# EAGLE board panelize-ext1 (EAGLE 7.2.0)
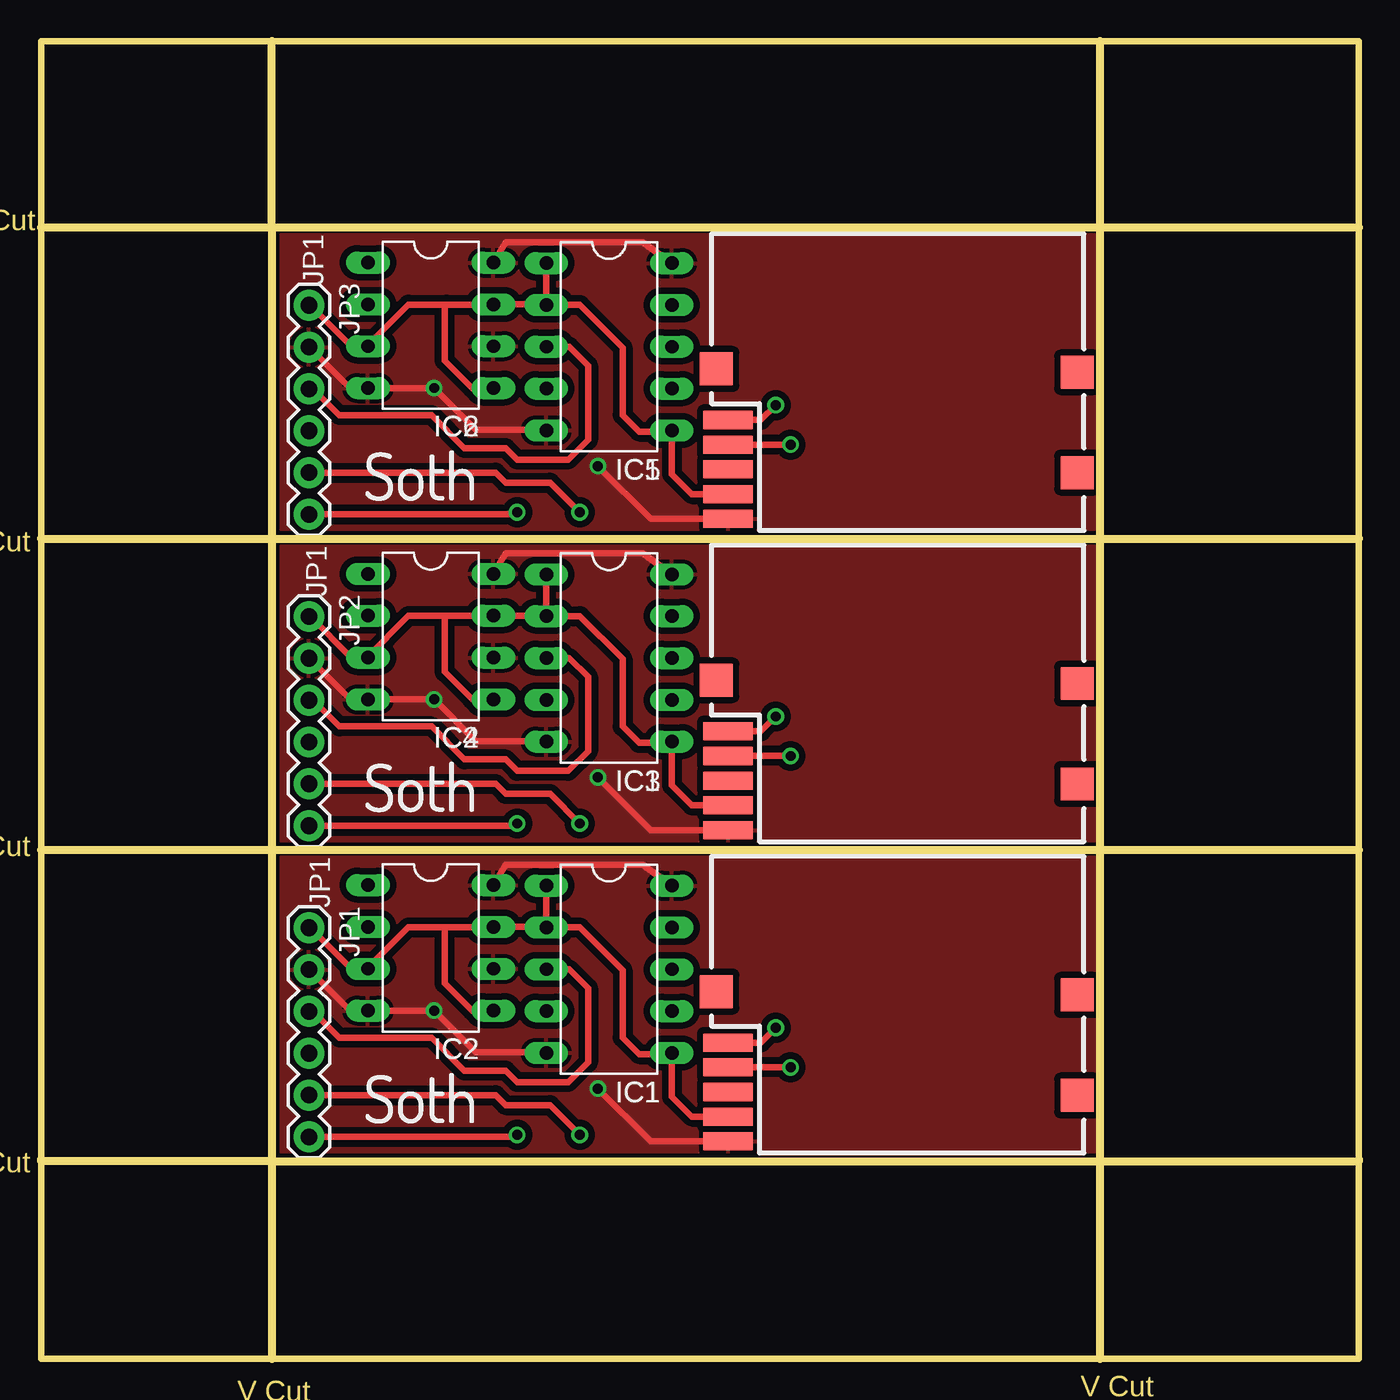
[diagram p0: board, top side]
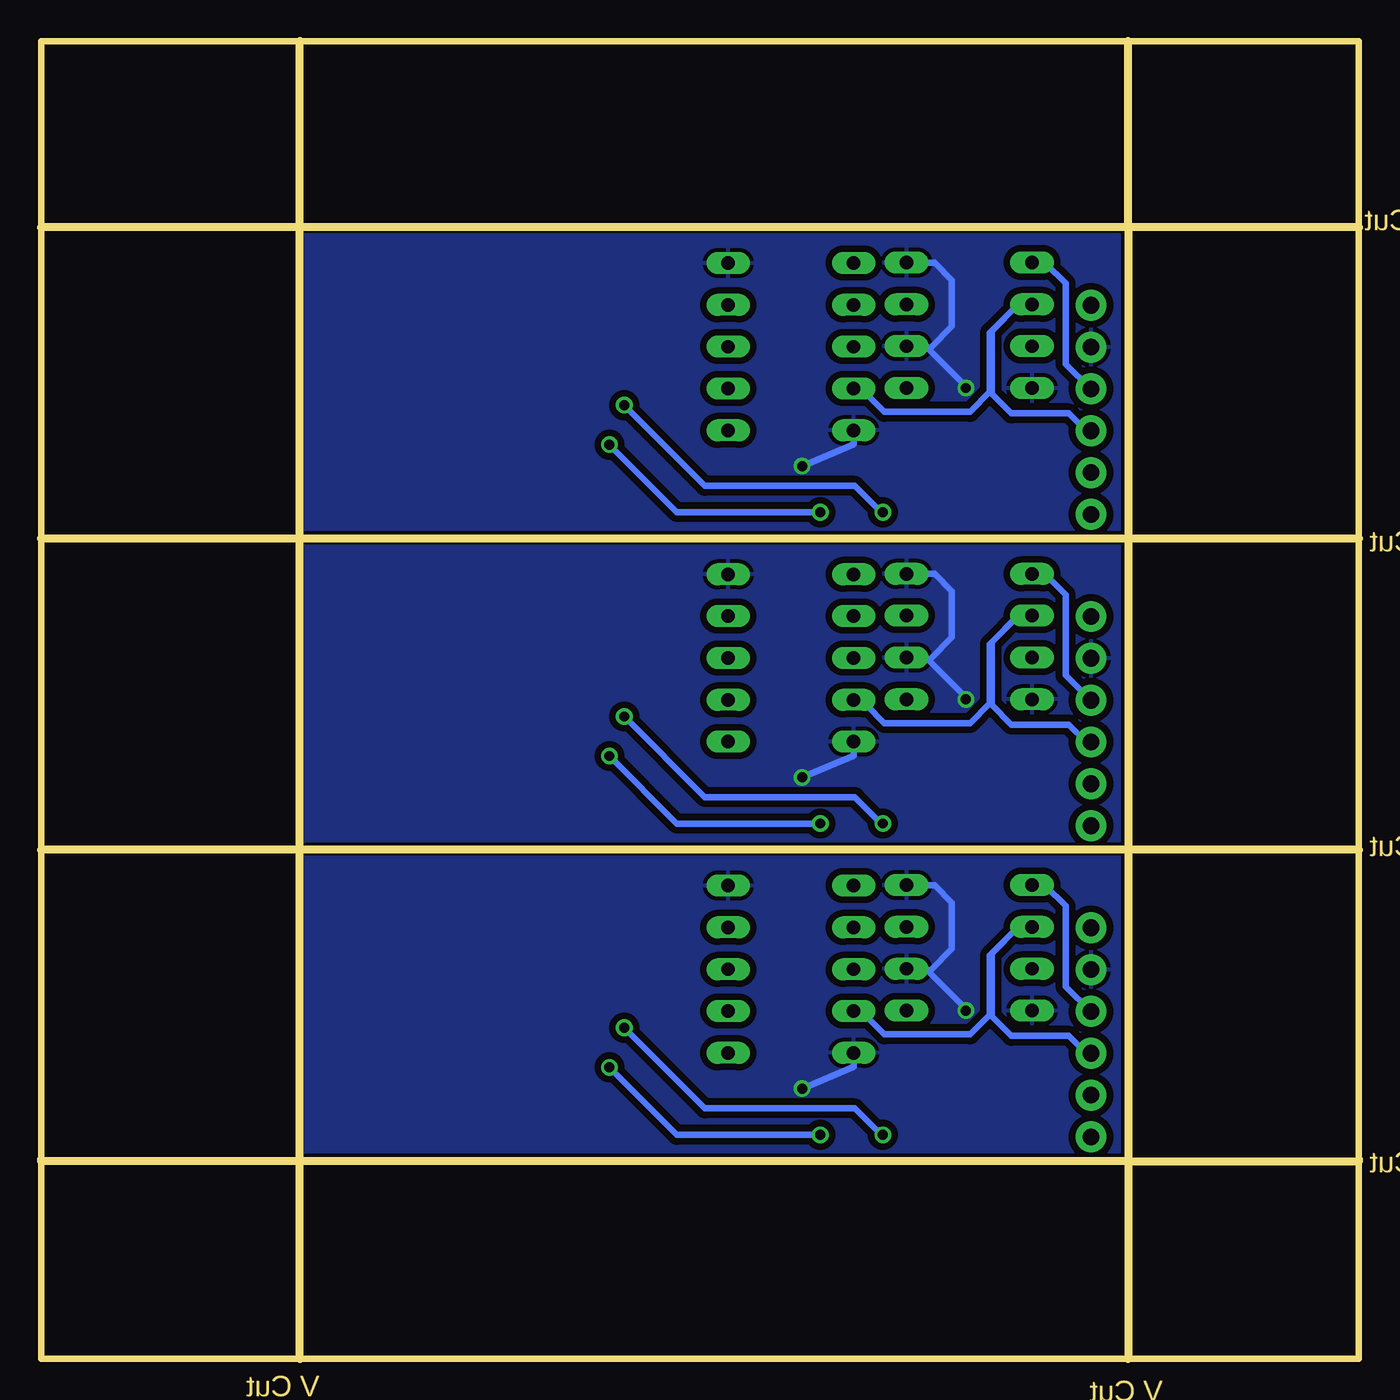
[diagram p1: board, bottom side, seen from below]

Size 80 x 80 mm. Coordinates in mm from the lower left corner, seen from the top.
Outline: 0,0 0,80 80,80 80,0 0,0
Copper layers (1*16): Top 0.035mm / dielectric 1.5mm / Bottom 0.035mm
Design rules "default": minimum track width 10mil, minimum drill 24mil, track to track 8mil, track to pad 8mil, pad to pad 8mil, via to via 8mil, smd to smd 8mil, copper to edge 40mil, drill to drill 8mil, minimum pad ring 10mil, minimum via ring 8mil, stop-mask expansion 4mil, vias tented up to drill 0mil, thermal gap 10mil
Milling: 14 lines

## Footprints (pad centres in the part's own frame; a part is rotated, then mirrored left to right if it is on the bottom)
DIL10 = drill 0.813 long: 1 -5.08,-3.81; 2 -2.54,-3.81; 3 0,-3.81; 4 2.54,-3.81; 5 5.08,-3.81; 6 5.08,3.81; 7 2.54,3.81; 8 0,3.81; 9 -2.54,3.81; 10 -5.08,3.81
DIL08 = drill 0.813 long: 1 -3.81,-3.81; 2 -1.27,-3.81; 3 1.27,-3.81; 4 3.81,-3.81; 5 3.81,3.81; 6 1.27,3.81; 7 -1.27,3.81; 8 -3.81,3.81
1X06 = drill 1.016 pad 1.88: 1 0,0; 2 2.54,0; 3 5.08,0; 4 7.62,0; 5 10.16,0; 6 12.7,0
GM318B = smd 3 x 1.1: GND 1,0.7; PWR_CTRL 1,6.7; RX 1,5.2; TX 1,3.7; VCC 1,2.2 | smd 2 x 2: MOUNT1 22.2,9.6; MOUNT2 22.2,3.5; MOUNT3 0.3,9.8

## Placement (x,y rotation side)
IC1  MPU-9250  [DIL10]  34.48,23.65 270 top
IC2  BME280  [DIL08]  23.65,24.95 270 top
IC3  MPU-9250  [DIL10]  34.48,42.55 270 top
IC4  BME280  [DIL08]  23.65,43.85 270 top
IC5  MPU-9250  [DIL10]  34.48,61.45 270 top
IC6  BME280  [DIL08]  23.65,62.75 270 top
JP1  [1X06]  16.26,26.17 270 top
JP2  [1X06]  16.26,45.07 270 top
JP3  [1X06]  16.26,63.97 270 top
U$1  GM318B  [GM318B]  40.7,12.5 0 top
U$2  SOTH_LOGO  [SILK_LOGO]  19.7,14.3 0 top
U$3  GM318B  [GM318B]  40.7,31.4 0 top
U$4  SOTH_LOGO  [SILK_LOGO]  19.7,33.2 0 top
U$5  GM318B  [GM318B]  40.7,50.3 0 top
U$6  SOTH_LOGO  [SILK_LOGO]  19.7,52.1 0 top

## Library data of the parts
IC1-IC6 = ic-package
JP1-JP3 = SparkFun-Connectors; PROD_ID: CONN-08437
U$1-U$6 = Soth

## Nets
GND [GND]: IC1.5 IC1.10 IC2.4 IC2.6 IC2.8 JP1.2 U$1.GND
GND1 [GND]: IC3.5 IC3.10 IC4.4 IC4.6 IC4.8 JP2.2 U$3.GND
GND2 [GND]: IC5.5 IC5.10 IC6.4 IC6.6 IC6.8 JP3.2 U$5.GND
N$1: JP2.5 U$3.RX
N$2: IC1.1 IC1.2 IC1.6 IC2.3 IC2.5 IC2.7 JP1.1 U$1.VCC
N$3: JP1.5 U$1.RX
N$4: JP1.6 U$1.PWR_CTRL
N$5: JP2.6 U$3.PWR_CTRL
N$6: IC3.4 IC4.2 JP2.4
N$7: IC1.4 IC2.2 JP1.4
N$8: IC1.3 IC2.1 JP1.3
N$9: IC3.3 IC4.1 JP2.3
N$10: IC3.1 IC3.2 IC3.6 IC4.3 IC4.5 IC4.7 JP2.1 U$3.VCC
N$11: JP3.5 U$5.RX
N$12: JP3.6 U$5.PWR_CTRL
N$13: IC5.4 IC6.2 JP3.4
N$14: IC5.3 IC6.1 JP3.3
N$15: IC5.1 IC5.2 IC5.6 IC6.3 IC6.5 IC6.7 JP3.1 U$5.VCC

## Tracks (layer width: path | path; a pad name or v marks a point on that pad's centre or on a via)
GND  (via drill 0.6)
  Top 0.406: JP1.2 18.7,21.2 19.28,21.2 IC2.4 v23.86,21.14 26.4,18.6 30.14,18.6 IC1.5 | 26.88,23.6 IC2.6 | IC2.8 28.2,30 36.52,30 IC1.10 | v33.8,16.4 37,13.2 U$1.GND
  Bottom 0.406: IC2.8 25.76,28.76 24.7,27.7 24.7,24.9 26,23.6 26.2,23.6 | 26.2,23.6 26.88,23.6 IC2.6 | v23.86,21.14 23.86,21.26 26.2,23.6 | IC1.5 30.67,17.73 v33.8,16.4
  pour Bottom (isolate 0.4): 14.5,30.5 64,30.5 64,12.5 14.5,12.5
  pour Top (isolate 0.4): 14.5,30.5 64,30.5 64,12.5 14.5,12.5
GND1  (via drill 0.6)
  Top 0.406: JP2.2 18.7,40.1 19.28,40.1 IC4.4 v23.86,40.04 26.4,37.5 30.14,37.5 IC3.5 | 26.88,42.5 IC4.6 | IC4.8 28.2,48.9 36.52,48.9 IC3.10 | v33.8,35.3 37,32.1 U$3.GND
  Bottom 0.406: IC4.8 25.76,47.66 24.7,46.6 24.7,43.8 26,42.5 26.2,42.5 | 26.2,42.5 26.88,42.5 IC4.6 | v23.86,40.04 23.86,40.16 26.2,42.5 | IC3.5 30.67,36.63 v33.8,35.3
  pour Bottom (isolate 0.4): 14.5,49.4 64,49.4 64,31.4 14.5,31.4
  pour Top (isolate 0.4): 14.5,49.4 64,49.4 64,31.4 14.5,31.4
GND2  (via drill 0.6)
  Top 0.406: JP3.2 18.7,59 19.28,59 IC6.4 v23.86,58.94 26.4,56.4 30.14,56.4 IC5.5 | 26.88,61.4 IC6.6 | IC6.8 28.2,67.8 36.52,67.8 IC5.10 | v33.8,54.2 37,51 U$5.GND
  Bottom 0.406: IC6.8 25.76,66.56 24.7,65.5 24.7,62.7 26,61.4 26.2,61.4 | 26.2,61.4 26.88,61.4 IC6.6 | v23.86,58.94 23.86,59.06 26.2,61.4 | IC5.5 30.67,55.53 v33.8,54.2
  pour Bottom (isolate 0.4): 14.5,68.3 64,68.3 64,50.3 14.5,50.3
  pour Top (isolate 0.4): 14.5,68.3 64,68.3 64,50.3 14.5,50.3
N$1  (via drill 0.6)
  Top 0.406: JP2.5 27.59,34.91 28.2,34.3 30.9,34.3 v32.7,32.5 | v45.5,36.6 U$3.RX
  Bottom 0.406: v32.7,32.5 41.4,32.5 v45.5,36.6
N$2
  Top 0.406: JP1.1 16.33,26.17 18.8,23.7 19.32,23.7 IC2.3 19.78,23.68 22.3,26.2 24.6,26.2 | 24.6,26.2 26.94,26.2 IC2.7 30.14,26.22 IC1.2 | IC1.2 IC1.1 | IC1.2 32.71,26.19 35.3,23.6 35.3,19.5 36.3,18.5 37.72,18.5 IC1.6 38.29,15.91 39.5,14.7 U$1.VCC | IC2.5 26.16,21.14 24.5,22.8 24.5,26.1 24.6,26.2
N$3  (via drill 0.6)
  Top 0.406: JP1.5 27.59,16.01 28.2,15.4 30.9,15.4 v32.7,13.6 | v45.5,17.7 U$1.RX
  Bottom 0.406: v32.7,13.6 41.4,13.6 v45.5,17.7
N$4  (via drill 0.6)
  Top 0.406: JP1.6 28.77,13.47 v28.9,13.6 | v44.6,20.1 43.7,19.2 U$1.PWR_CTRL
  Bottom 0.406: v28.9,13.6 29,13.6 30.6,15.2 39.7,15.2 v44.6,20.1
N$5  (via drill 0.6)
  Top 0.406: JP2.6 28.77,32.37 v28.9,32.5 | v44.6,39 43.7,38.1 U$3.PWR_CTRL
  Bottom 0.406: v28.9,32.5 29,32.5 30.6,34.1 39.7,34.1 v44.6,39
N$6
  Bottom 0.406: JP2.4 16.55,37.45 17.6,38.5 21.1,38.5 22.3,39.7 22.3,43.5 20.7,45.1 19.86,45.1 IC4.2 20.68,45.12 22.4,43.4 22.4,39.8 23.6,38.6 28.8,38.6 29.9,39.7 30.36,39.7 IC3.4
N$7
  Bottom 0.406: JP1.4 16.55,18.55 17.6,19.6 21.1,19.6 22.3,20.8 22.3,24.6 20.7,26.2 19.86,26.2 IC2.2 20.68,26.22 22.4,24.5 22.4,20.9 23.6,19.7 28.8,19.7 29.9,20.8 30.36,20.8 IC1.4
N$8
  Top 0.406: IC1.3 32.05,23.65 33.2,22.5 33.2,18 32,16.8 28.9,16.8 28.2,17.5 25.7,17.5 23.7,19.5 18.1,19.5 16.8,20.8 16.55,20.8 JP1.3
  Bottom 0.406: JP1.3 16.29,21.09 17.8,22.6 17.8,27.5 19,28.7 19.78,28.7 IC2.1
N$9
  Top 0.406: IC3.3 32.05,42.55 33.2,41.4 33.2,36.9 32,35.7 28.9,35.7 28.2,36.4 25.7,36.4 23.7,38.4 18.1,38.4 16.8,39.7 16.55,39.7 JP2.3
  Bottom 0.406: JP2.3 16.29,39.99 17.8,41.5 17.8,46.4 19,47.6 19.78,47.6 IC4.1
N$10
  Top 0.406: JP2.1 16.33,45.07 18.8,42.6 19.32,42.6 IC4.3 19.78,42.58 22.3,45.1 24.6,45.1 | 24.6,45.1 26.94,45.1 IC4.7 30.14,45.12 IC3.2 | IC3.2 IC3.1 | IC3.2 32.71,45.09 35.3,42.5 35.3,38.4 36.3,37.4 37.72,37.4 IC3.6 38.29,34.81 39.5,33.6 U$3.VCC | IC4.5 26.16,40.04 24.5,41.7 24.5,45 24.6,45.1
N$11  (via drill 0.6)
  Top 0.406: JP3.5 27.59,53.81 28.2,53.2 30.9,53.2 v32.7,51.4 | v45.5,55.5 U$5.RX
  Bottom 0.406: v32.7,51.4 41.4,51.4 v45.5,55.5
N$12  (via drill 0.6)
  Top 0.406: JP3.6 28.77,51.27 v28.9,51.4 | v44.6,57.9 43.7,57 U$5.PWR_CTRL
  Bottom 0.406: v28.9,51.4 29,51.4 30.6,53 39.7,53 v44.6,57.9
N$13
  Bottom 0.406: JP3.4 16.55,56.35 17.6,57.4 21.1,57.4 22.3,58.6 22.3,62.4 20.7,64 19.86,64 IC6.2 20.68,64.02 22.4,62.3 22.4,58.7 23.6,57.5 28.8,57.5 29.9,58.6 30.36,58.6 IC5.4
N$14
  Top 0.406: IC5.3 32.05,61.45 33.2,60.3 33.2,55.8 32,54.6 28.9,54.6 28.2,55.3 25.7,55.3 23.7,57.3 18.1,57.3 16.8,58.6 16.55,58.6 JP3.3
  Bottom 0.406: JP3.3 16.29,58.89 17.8,60.4 17.8,65.3 19,66.5 19.78,66.5 IC6.1
N$15
  Top 0.406: JP3.1 16.33,63.97 18.8,61.5 19.32,61.5 IC6.3 19.78,61.48 22.3,64 24.6,64 | 24.6,64 26.94,64 IC6.7 30.14,64.02 IC5.2 | IC5.2 IC5.1 | IC5.2 32.71,63.99 35.3,61.4 35.3,57.3 36.3,56.3 37.72,56.3 IC5.6 38.29,53.71 39.5,52.5 U$5.VCC | IC6.5 26.16,58.94 24.5,60.6 24.5,63.9 24.6,64

## Text on the board
Milling: V Cut | V Cut | V Cut | V Cut | V Cut | V Cut
_tNames: JP1 | IC2 | IC1 | JP1 | IC2 | IC1 | JP1 | IC2 | IC1